# Altium PCB remoter_pcb.PcbDoc
Units mm, origin at the board's own origin, x right, y up, seen from the top; angles counter-clockwise.
Board outline 97.41 x 79.24 mm, 2 copper layers (Top Layer, Bottom Layer); 42 components, 48 nets, 183 pads, 28 vias.
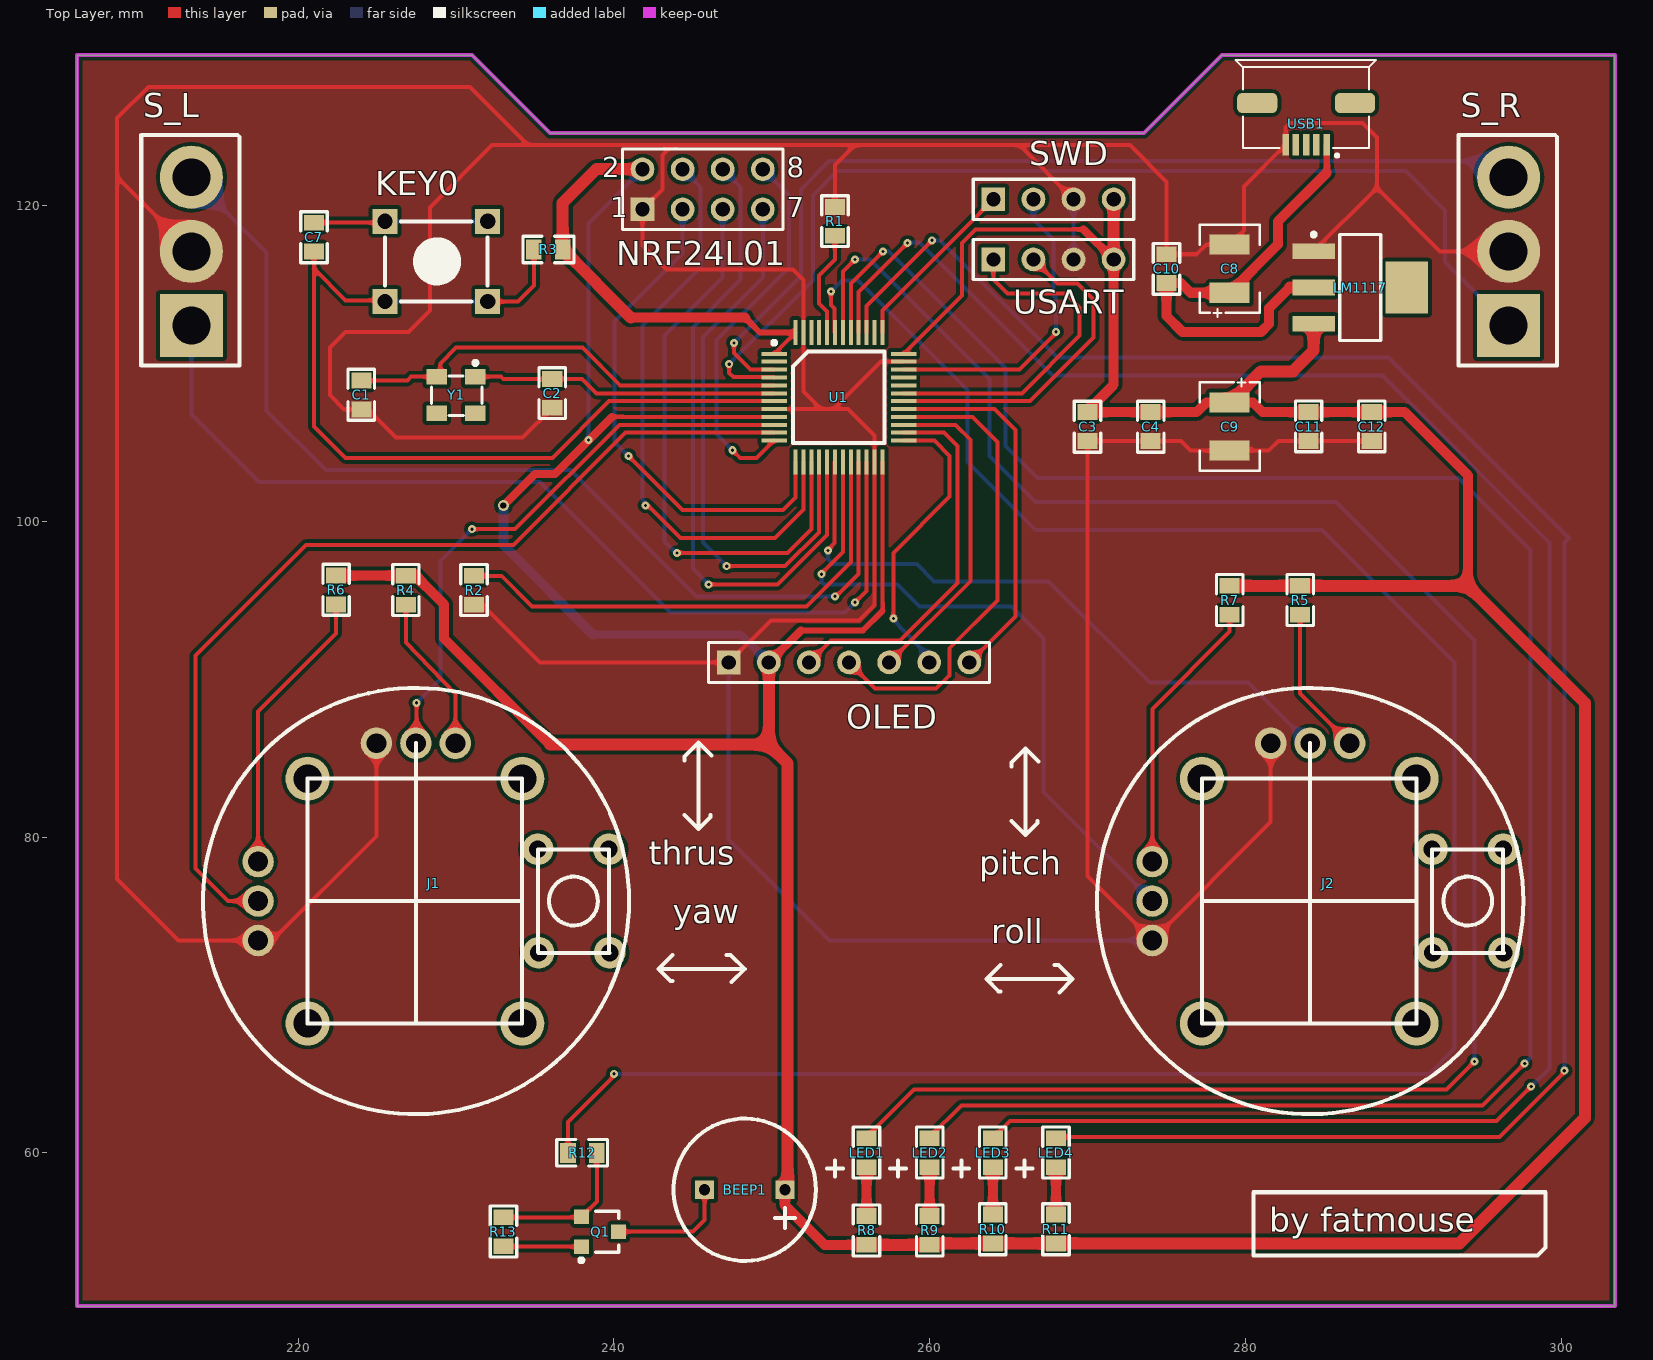
[diagram p0: Top Layer view]
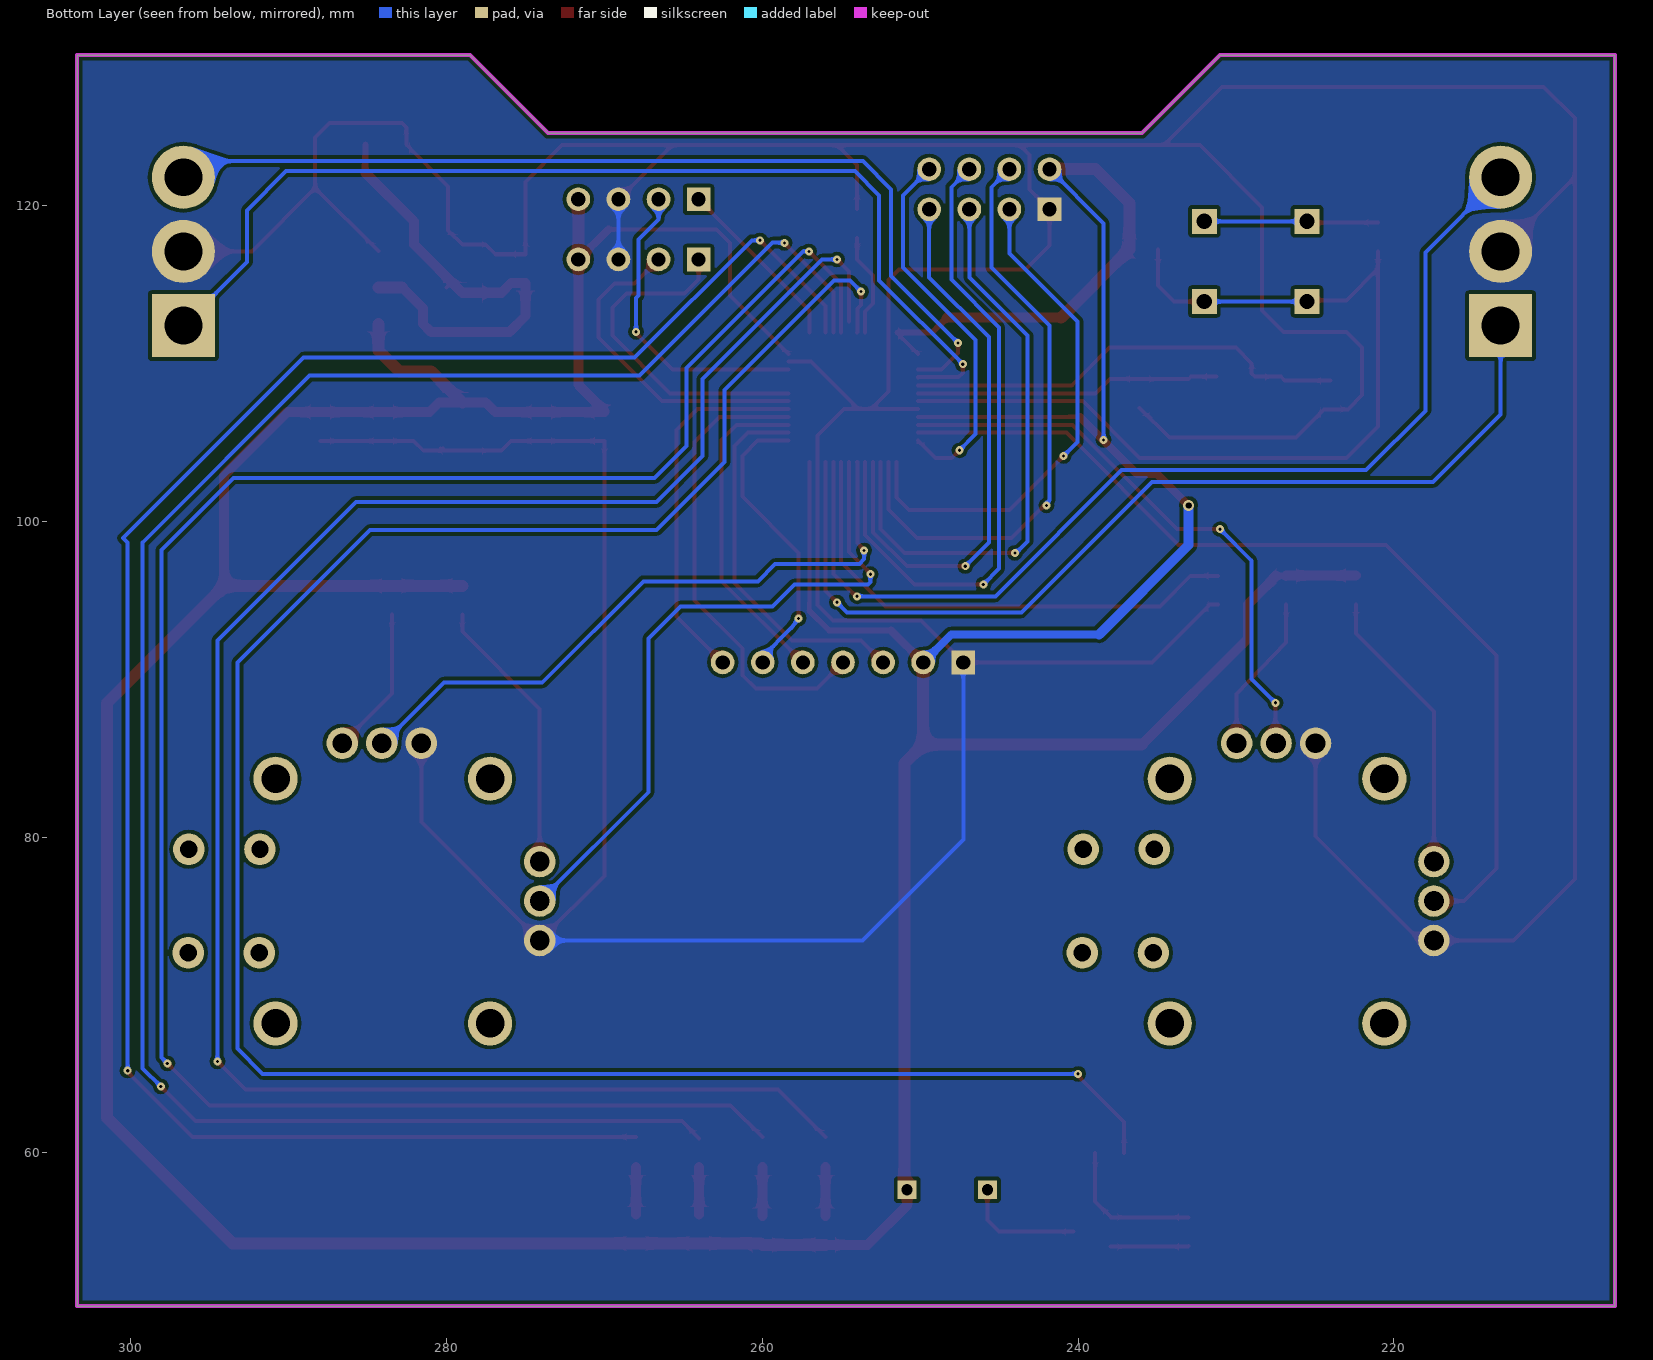
[diagram p1: Bottom Layer view, seen from below]

## Layer stack, top to bottom
Top Solder: solder mask 0.0102, Solder Resist, Dk 3.5
Top Layer: signal copper 0.0356
Dielectric 1: dielectric 0.32, FR-4, Dk 4.8
Bottom Layer: signal copper 0.0356
Bottom Solder: solder mask 0.0102, Solder Resist, Dk 3.5

## Board outline
205.994,50.292 205.994,129.53 231.01,129.53 235.953,124.587 273.567,124.587 278.51,129.53 303.403,129.53 303.403,50.292

## Design rules (kind name [scope] priority, off if disabled: settings)
Clearance [All] p1: gap=0.229 ignorepadtopadclearanceinfootprint=FALSE
ComponentClearance [All] p1 off: gap=0.254 collisioncheckmode=3 verticalgap=0.254 showdistances=FALSE
PolygonConnect [All] p1: connectstyle=Direct reliefconductorwidth=0.254 reliefentries=4 polygonreliefangle="90 Angle" airgapwidth=0.254
RoutingVias [All] p1: holewidth=0.711 width=1.27 viastyle="Through Hole" minholewidth=0.711 minwidth=1.27 maxholewidth=0.711 maxwidth=1.27
SolderMaskExpansion [All] p1: expansion=0.102
Width [All] p1: maxlimit=0.762 minlimit=0.254 preferedwidth=0.254
29 further rules are at their usual default settings.

## Components (designator, comment, footprint, x,y, rotation, side; value= is the part's Value field where it differs from the comment)
BEEP1 "BEEP" BELL-5 250.825,57.658 r180 top
C1 "Cap" 0805 224,108 r90 top value=22pF
C2 "Cap" 0805 236.093,108.102 r90 top value=22pF
C3 "Cap" 0805 270,106 r270 top value=100pF
C4 "Cap" 0805 274,106 r270 top value=100pF
C7 "Cap" 0805 221,118 r270 top value=100pF
C8 "10uF" C1206 279,116 r90 top
C9 "10uF" C1206 279,106 r270 top
C10 "0.01uF" 0805 275,116 r270 top
C11 "0.01uF" 0805 284,106 r90 top
C12 "0.01uF" 0805 288,106 r90 top
J1 "油门摇杆" 摇杆2 231.775,74.295 r180 top
J2 "油门摇杆" 摇杆2 288.417,74.295 r180 top
KEY0 "KEY_L" KEY_M 225.5,119 r0 top
LED1 "BLUE" 0805 256,60 r90 top
LED2 "BLUE" 0805 260,60 r90 top
LED3 "BLUE" 0805 264,60 r90 top
LED4 "BLUE" 0805 268,60 r90 top
LM1117 "LM1117" SOT223_M 287.274,114.808 r0 top
NRF24L01 "NRF24L01" HDR2X4 241.808,119.761 r0 top
OLED "OLED" HDR1X7 247.269,91.059 r0 top
Q1 "S8050" SOT-23R 239,55 r270 top
R1 "Res2" 0805 254,119 r90 top value=1K
R2 "Res2" 0805 231.14,95.631 r90 top value=1K
R3 "Res2" 0805 235.839,117.221 r0 top value=1K
R4 "1K" 0805 226.822,95.631 r90 top
R5 "1K" 0805 283.464,94.996 r90 top
R6 "1K" 0805 222.4,95.65 r90 top
R7 "1K" 0805 279,95 r90 top
R8 "Res2" 0805 256,55.086 r270 top value=1K
R9 "Res2" 0805 260,55.086 r270 top value=1K
R10 "Res2" 0805 264,55.171 r270 top value=1K
R11 "Res2" 0805 268,55.171 r270 top value=1K
R12 "Res2" 0805 238,60 r180 top value=1K
R13 "Res2" 0805 233,55 r90 top value=10K
S_L "SW-SPDT" 扭子开关 213.233,112.395 r90 top
S_R "SW-SPDT" 扭子开关 296.672,112.395 r90 top
SWD "Header 4" HDR1X4 264.033,120.396 r0 top
U1 "STM32F103C8" mTQFP48 250.15,110.609 r0 top
USART "Header 4" HDR1X4 264.033,116.586 r0 top
USB1 "USB" MICROUSB-SOP 283.845,126.492 r0 top
Y1 "8MHZ" "XTAL3225   无源" 230,108 r180 top

## Footprints (in the part's own frame and the unit in brackets; to place one, negate y for a bottom-side part, rotate by r counter-clockwise, add the part's x,y. Pads: shape width x height; smd on the part's side, far side on the other; paste and mask are expansions set on the pad)
0805 [mm]
  rect 1x1.27 smd: 1(-0.914,0) 2(0.914,0)
  silkscreen extent -1.6,-0.84 1.63,0.84
BELL-5 [mm]
  rect 1.2x1.2 hole 0.7: 1(0,0) 2(5.08,0)
  silkscreen extent -1.97,-4.51 7.05,4.51
C1206 [mil] "C1206"
  rect 50x100 smd: 1(-60,0) 2(60,0)
  silkscreen extent -120,-75 110,75
HDR1X4 [mm] "Connector; Header; 4 Position"
  rect 1.5x1.5 hole 0.9: 1(0,0)
  round 1.5 hole 0.9: 2(2.54,0) 3(5.08,0) 4(7.62,0)
  silkscreen extent -1.27,-1.27 8.89,1.27
HDR1X7 [mm] "Connector; Header; 7 Position"
  rect 1.5x1.5 hole 0.9: 1(0,0)
  round 1.5 hole 0.9: 2(2.54,0) 3(5.08,0) 4(7.62,0) 5(10.16,0) 6(12.7,0) 7(15.24,0)
  silkscreen extent -1.27,-1.27 16.51,1.27
HDR2X4 [mm] "Connector; Header; 4x2 Position"
  rect 1.5x1.5 hole 0.9: 1(0,0)
  round 1.5 hole 0.9: 2(0,2.54) 3(2.54,0) 4(2.54,2.54) 5(5.08,0) 6(5.08,2.54) 7(7.62,0) 8(7.62,2.54)
  silkscreen extent -1.27,-1.27 8.89,3.81
KEY_M [mil]
  rect 62x62 hole 38: 1(0,0) 1(255.91,0) 2(0,-200) 2(255.91,-200)
  silkscreen extent 0,-200 255,0
MICROUSB-SOP [mm]
  rrect50% 2.54x1.27 smd: 0(-3.099,0) 0(3.099,0)
  rect 0.4x1.35 smd: 1(1.3,-2.642) 2(0.65,-2.642) 3(0,-2.642) 4(-0.65,-2.642) 5(-1.3,-2.642)
  silkscreen extent -4.47,-3.43 4.42,2.72
mTQFP48 [mm]
  rect 1.6x0.254 smd: 1(0,0) 2(0,-0.5) 3(0,-1) 4(0,-1.5) 5(0,-2) 6(0,-2.5) 7(0,-3) 8(0,-3.5) 9(0,-4) 10(0,-4.5) 11(0,-5) 12(0,-5.5) 25(8.2,-5.5) 26(8.2,-5) 27(8.2,-4.5) 28(8.2,-4) 29(8.2,-3.5) 30(8.2,-3) 31(8.2,-2.5) 32(8.2,-2) 33(8.2,-1.5) 34(8.2,-1) 35(8.2,-0.5) 36(8.2,0)
  rect 0.254x1.6 smd: 13(1.35,-6.85) 14(1.85,-6.85) 15(2.35,-6.85) 16(2.85,-6.85) 17(3.35,-6.85) 18(3.85,-6.85) 19(4.35,-6.85) 20(4.85,-6.85) 21(5.35,-6.85) 22(5.85,-6.85) 23(6.35,-6.85) 24(6.85,-6.85) 37(6.85,1.35) 38(6.35,1.35) 39(5.85,1.35) 40(5.35,1.35) 41(4.85,1.35) 42(4.35,1.35) 43(3.85,1.35) 44(3.35,1.35) 45(2.85,1.35) 46(2.35,1.35) 47(1.85,1.35) 48(1.35,1.35)
  silkscreen extent -0.12,-5.65 7,0.82
SOT223_M [mm] "SOT223, 4-Leads, Body 6.5x3.5mm, Pitch 2.3mm, Lead Span 7mm, IPC Low Density"
  rect 2.7x1 smd: 1(-2.95,2.3) 2(-2.95,0) 3(-2.95,-2.3)
  rect 2.7x3.3 smd: 4(2.95,0)
  silkscreen extent -3.07,-3.35 1.3,3.47, body extent -1.85,-3.35 1.85,3.35, height 1.7
SOT-23R [mm]
  rect 0.9x0.95 smd: 1(0.95,-1.048) 2(-0.95,-1.048) 3(0,1.302)
  silkscreen extent -1.3,-1.19 1.93,1.3
"XTAL3225   无源" [mm]
  rect 1.3x1 smd: 1(-1.219,-1.156) 2(1.219,-1.156) 3(1.219,1.156) 4(-1.219,1.156)
  silkscreen extent -1.65,-2.16 1.55,1.29
扭子开关 [mm]
  rect 4x4 hole 2.4: 1(0,0)
  round 4 hole 2.4: 2(4.7,0) 3(9.4,0)
  silkscreen extent -2.54,-3.05 12.06,3.18
摇杆2 [mm]
  round 2.8 hole 1.8: 0(-2.413,6.102) 0(-2.413,-9.398) 0(11.176,6.102) 0(11.176,-9.398)
  round 2 hole 1.25: 1(14.318,0.849) 2(14.318,-1.651) 3(14.318,-4.151) 4(6.818,-11.651) 5(4.318,-11.651) 6(1.818,-11.651)
  round 2 hole 1.1: J1(-7.95,1.626) J1(-7.904,-4.925) J2(-3.45,1.626) J2(-3.404,-4.925)
  silkscreen extent -9.18,-15.15 17.81,11.85

## Part data
C1 C2 C3 C4 C7: "Capacitor", LatestRevisionDate=17-Jul-2002, LatestRevisionNote="Re-released for DXP Platform.", PackageDescription="Radial Cap, Thru-Hole; 2 Leads; 0.3 in Pin Spacing", PackageReference=RAD-0.3, Published=8-Jun-2000, Publisher="Altium Limited"
C8 C9: library part CAP
C10 C11 C12: library part C
J1 J2: library part 摇杆, "摇杆"
KEY0: library part KEY
LED1 LED2 LED3 LED4: library part LED
LM1117: "线性稳压3.3V"
Q1: library part NPN, "8050/BCW846/BCW847"
R1 R2 R3 R8 R9 R10 R11 R12 R13: "Resistor", LatestRevisionDate=17-Jul-2002, LatestRevisionNote="Re-released for DXP Platform.", PackageDescription="Axial Device, Thru-Hole; 2 Leads; 0.4 in Pin Spacing", PackageReference=AXIAL-0.4, Published=8-Jun-2000, Publisher="Altium Limited"
R4 R5 R6 R7: library part R
S_L S_R: "SPDT Subminiature Toggle Switch, Right Angle Mounting, Vertical Actuation", ComponentLink1Description="Manufacturer Link", ComponentLink1URL=http://www.apem.com, DatasheetVersion=05-Dec-2000, LatestRevisionDate=17-Dec-2003, LatestRevisionNote="Schematic revised, PCB Footprint replaced.", PackageDescription="Switch; 4 Leads", PackageReference=TL36WW15050, Published=24-Mar-1999, Publisher="Altium Limited"
SWD USART: "Header, 4-Pin", LatestRevisionDate=17-Jul-2002, LatestRevisionNote="Re-released for DXP Platform.", Publisher="Altium Limited"
U1: library part STM32F103C6
USB1: library part USB5
Y1: library part XTAL, "Crystal Oscillator", LatestRevisionDate=17-Jul-2002, LatestRevisionNote="Re-released for DXP Platform.", PackageDescription="Crystal, Thru-Hole; 2 Leads; Body 3.1 x 8.2 mm (Dia.xH)", PackageReference=R38, Published=8-Jun-2000, Publisher="Altium Limited"

## Via types
v1: diameter 0.508, hole 0.203, Top Layer to Bottom Layer, 27 vias
v2: diameter 0.711, hole 0.406, Top Layer to Bottom Layer, 1 vias

## Nets (pads, with @x,y where several pads share a name; then routed paths per layer and width w, separated by ;. In a path a pad name is that pad's centre, name@x,y a point inside that pad or via, vN(x,y) a via of type N, cw(c..) or ccw(c..) an arc to the next point about the centre after c; other vN are vias at no path point)
3.3V: BEEP1.1 C3.1 C4.1 C9.1 C11.2 C12.2 LM1117.3 NRF24L01.2 OLED.2 R3.2 R4.2 R5.2 R6.2 R7.2 R8.2 R9.2 R10.2 R11.2 SWD.4 U1.1 U1.9 U1.24 U1.36 U1.48 USART.4 | length 356.1
  Top Layer w0.254: R4.2 R4.2@227.432,96.545 ; 239.882,106.609 U1.9 ; U1.1@250.142,110.617 U1.1 U1.48 ; U1.24 257.023,103.736 257.023,94.336 ; U1.36 262.033,114.292 262.033,117.634 262.89,118.491 269.748,118.491
  Top Layer w0.381: 248.3,112.9 248.76,112.44 249.25,111.95 U1.48@251.45,111.95 ; 251.841,93.091 255.778,93.091 257.023,94.336
  Top Layer w0.508: v2(233,101) 235,103 236.273,103 239.882,106.609 ; OLED.2 251.841,93.091 ; 269.748,118.491 USART.4
  Top Layer w0.635: R6.2 226.803,96.564 R4.2 ; R4.2@227.432,96.545 229.235,94.742 229.235,92.583 235.966,85.852 ; 241.074,112.9 248.3,112.9 ; BEEP1.1@251,57.833 BEEP1.1 250.825,56.675 253.329,54.171 R8.2 ; C3.1 C4.1 276.914,106.914 277.524,107.524 C9.1 280.476,107.524 281.086,106.914 C11.2 C12.2 290.086,106.914 294.09,102.91 294.09,95.91 ; C3.1@270,107 271.653,108.653 USART.4
  Top Layer w0.762: 235.966,85.852 249.809,85.852 ; 241.074,112.9 R3.2 236.753,120.167 238.887,122.301 NRF24L01.2 ; OLED.2 249.809,85.852 ; BEEP1.1@251,57.833 251,84.661 249.809,85.852 ; R8.2 R9.2 260.086,54.257 R10.2 R11.2 293.55,54.257 301.498,62.205 301.498,88.502 294.09,95.91 R5.2 283.46,95.914 R7.2 ; USART.4 SWD.4 ; C9.1 280.976,109.5 283,109.5 284.324,110.824 LM1117.3
  Bottom Layer w0.254: v1(238.379,105.156) 238.379,118.872 NRF24L01.2
  Bottom Layer w0.508: 238.663,92.837 248.031,92.837 OLED.2
  Bottom Layer w0.635: v2(233,101) 233,98.5 238.663,92.837
5V: C8.1 C10.2 LM1117.2 USB1.1 | length 29.9
  Top Layer w0.254: C8.1@279.908,114.91 C8.1@280.01,114.808
  Top Layer w0.381: 285.145,122.077 USB1.1
  Top Layer w0.635: 282.808,114.808 281.5,113.5 281.5,112.5 281,112 276,112 275,113 C10.2 275.914,115.086 276.524,114.476 C8.1 282.067,117.543 282.067,118.999 285.145,122.077
  Top Layer w0.762: 282.808,114.808 LM1117.2
ADC_PITCH: J2.2 U1.19 | length 43.3
  Top Layer w0.254: v1(253.15,96.65) 253.113,96.65 253.1,96.663 254.501,98.064 U1.19 U1.19
  Bottom Layer w0.254: v1(253.15,96.65) 253.15,96.15 253.3,96 257.968,96 259.368,94.6 265.191,94.6 267.208,92.583 267.208,82.837 J2.2
ADC_ROLL: J2.5 U1.18 | length 41.8
  Top Layer w0.254: v1(253.55,98.15) 253.518,98.15 253.983,98.614 253.983,103.742 U1.18
  Bottom Layer w0.254: v1(253.55,98.15) 253.55,97.605 253.855,97.3 259.186,97.3 260.286,96.2 267.528,96.2 273.939,89.789 280.162,89.789 284.005,85.946 J2.5
ADC_THRUS: J1.2 U1.11 | length 60.8
  Top Layer w0.254: J1.2 215.554,75.946 213.5,78 213.5,91.5 220.5,98.5 233.628,98.5 240.738,105.61 U1.11@250.149,105.61
ADC_YAW: J1.5 U1.10 | length 36.9
  Top Layer w0.254: J1.5 227.5,85.989 v1(227.5,88.5) ; v1(231,99.5) 233.738,99.5 240.347,106.109 U1.10
  Bottom Layer w0.254: v1(227.5,88.5) 229,90 229,97.5 v1(231,99.5)
BEEP: R12.2 U1.43 | length 139.8
  Top Layer w0.254: R12.2 237.086,61.953 240,64.867 v1(240,65) ; v1(253.746,114.554) 253.746,113.712 253.983,113.476 253.983,111.976 U1.43
  Bottom Layer w0.254: v1(240,65) 291.65,65 293.243,66.593 293.243,91.059 284.861,99.441 266.7,99.441 262.382,103.759 262.382,108.331 255.463,115.25 254.442,115.25 v1(253.746,114.554)
BOOT0: R1.1 U1.44 | length 6.6
  Top Layer w0.254: U1.44 253.492,111.967 253.492,113.284 252.984,113.792 252.984,115.57 254,116.586 R1.1@254,117.958
BOOT1: R2.2 U1.20 | length 32.2
  Top Layer w0.254: R2.2 232.893,96.545 234.823,94.615 252.195,94.615 255.016,97.436 255.016,103.743 U1.20
GND: C1.1 C2.1 C3.2 C4.2 C8.2 C9.2 C10.1 C11.1 C12.1 J1.1 J1.4 J2.1 J2.4 LM1117.1 NRF24L01.1 OLED.1 R1.2 R2.1 S_L.2 S_R.2 SWD.3 U1.8 U1.23 U1.35 U1.47 USART.3 USB1.5 | length 435.9
  Top Layer w0.254: S_L.2 208.534,121.794 ; J1.4 224.957,80.05 218.353,73.446 J1.1 212.431,73.446 208.534,77.343 208.534,121.794 ; R2.1 231.648,94.717 235.306,91.059 OLED.1 249.936,93.726 255.524,93.726 256.5,94.702 U1.23 256.5,105.419 254.81,107.109 253.921,107.109 ; C2.1 234.205,105.3 226.2,105.3 224.414,107.086 C1.1 222.914,107.086 222,108 222,111 223,112 227,112 228.346,113.346 228.346,119.888 232.283,123.825 234.569,123.825 ; U1.8 253.111,107.109 ; R1.2@254,119.786 R1.2 254,122.555 255.27,123.825 ; U1.35 256.921,110.109 253.921,107.109 ; SWD.3 265.684,123.825 ; C9.2@280.213,104.597 280.289,104.521 280.391,104.623 ; J2.4 281.599,80.946 J2.1 270,77.545 C3.2 C4.2 275.914,105.086 276.524,104.476 C9.2 281.476,104.476 282.086,105.086 C11.1 C12.1 ; LM1117.1 288.32,121.104 ; S_R.2@297.181,116.586 S_R.2 292.329,117.095 288.32,121.104 ; 208.534,121.794 208.534,125.534 210.508,127.508 230.886,127.508 234.569,123.825 ; 234.569,123.825 243.713,123.825 ; 243.713,123.825 255.27,123.825 ; 243.713,123.825 243.078,123.19 243.078,121.031 NRF24L01.1 241.808,117.475 243.332,115.951 251.333,115.951 252,115.284 U1.47 252,108.22 253.111,107.109 ; 253.111,107.109 253.921,107.109 ; 255.27,123.825 265.684,123.825 ; 265.684,123.825 272.675,123.825 275,121.5 C10.1 276.914,116.914 277.524,117.524 C8.2 279.908,118.432 279.908,121.213 USB1.5 282.545,124.938 282.829,125.222 287.401,125.222 288.32,124.303 288.32,121.104
  Bottom Layer w0.254: OLED.1 247.269,79.831 253.654,73.446 J2.1 ; USART.3 SWD.3
LED0: LED1.2 U1.42 | length 123.5
  Top Layer w0.254: U1.42@254.517,112.649 254.5,112.666 254.5,115.816 v1(255.27,116.586) ; LED1.2@256,61 259,64 292.727,64 v1(294.513,65.786)
  Bottom Layer w0.254: v1(255.27,116.586) 256.214,116.586 263.779,109.021 263.779,104.14 266.7,101.219 285.75,101.219 294.513,92.456 v1(294.513,65.786)
LED1: LED2.2 U1.41 | length 130
  Top Layer w0.254: U1.41 255,115.05 v1(257.048,117.098) ; LED2.2@260,61 262,63 295.029,63 v1(297.688,65.659)
  Bottom Layer w0.254: v1(257.048,117.098) 257.419,117.098 264.795,109.722 264.795,104.775 266.827,102.743 293.497,102.743 298.069,98.171 298.069,66.04 v1(297.688,65.659)
LED2: LED3.2 U1.40 | length 125.9
  Top Layer w0.254: U1.40 255.5,114.53 v1(258.6,117.63) ; LED3.2 265.086,62 295.9,62 v1(298.1,64.2)
  Bottom Layer w0.254: v1(258.6,117.63) 258.62,117.65 259.35,117.65 267.78,109.22 288.671,109.22 299.25,98.641 299.25,65.35 v1(298.1,64.2)
LED3: LED4.2 U1.39 | length 123.7
  Top Layer w0.254: U1.39 256,113.65 v1(260.149,117.8) ; LED4.2@268,61 296.106,61 300.306,65.2 v1(300.2,65.2)
  Bottom Layer w0.254: v1(260.149,117.8) 260.66,117.8 268.097,110.363 289.052,110.363 300.482,98.933 300.2,98.651 v1(300.2,65.2)
NetBEEP1_2: BEEP1.2 Q1.3 | length 7.7
  Top Layer w0.254: Q1.3 245,55 245.745,55.745 BEEP1.2
NetC7_1: C7.1 KEY0.1 | length 11
  Top Layer w0.254: C7.1 225.414,118.914 KEY0.1@225.5,119
  Bottom Layer w0.254: KEY0.1@225.5,119 KEY0.1@232,119
NetJ1_3: J1.3 R6.1 | length 18.3
  Top Layer w0.254: J1.3 217.457,87.957 222.4,92.9 R6.1
NetJ1_6: J1.6 R4.1 | length 10
  Top Layer w0.254: R4.1 226.822,92.329 229.957,89.067 J1.6
NetJ2_3: J2.3 R7.1 | length 17.7
  Top Layer w0.254: J2.3 274.099,88.12 279,93.021 R7.1
NetJ2_6: J2.6 R5.1 | length 9.4
  Top Layer w0.254: R5.1 283.464,89.081 J2.6
NetLED1_1: LED1.1 R8.1 | length 3.1
  Top Layer w0.635: R8.1 LED1.1
NetLED2_1: LED2.1 R9.1 | length 3.1
  Top Layer w0.635: R9.1 LED2.1
NetLED3_1: LED3.1 R10.1 | length 3
  Top Layer w0.635: R10.1 LED3.1
NetLED4_1: LED4.1 R11.1 | length 3
  Top Layer w0.635: R11.1 LED4.1
NetQ1_1: Q1.1 R13.1 | length 5
  Top Layer w0.254: R13.1 233.036,54.05 Q1.1
NetQ1_2: Q1.2 R12.1 R13.2 | length 9.4
  Top Layer w0.254: R13.2 237.916,55.914 Q1.2 238.914,56.912 R12.1
NRF_CE: NRF24L01.3 U1.13 | length 32.4
  Top Layer w0.254: v1(240.919,104.14) 244.348,100.711 250.698,100.711 251.5,101.513 U1.13
  Bottom Layer w0.254: v1(240.919,104.14) 240.03,105.029 240.03,112.649 244.348,116.967 NRF24L01.3
NRF_CSN: NRF24L01.4 U1.14 | length 38
  Top Layer w0.254: v1(242,101) 242.154,101 244.221,98.933 250.19,98.933 252,100.743 U1.14
  Bottom Layer w0.254: v1(242,101) 242,101.154 241.808,101.346 241.808,112.395 245.491,116.078 245.491,121.158 NRF24L01.4
NRF_IRQ: NRF24L01.8 U1.12 | length 24.1
  Top Layer w0.254: v1(247.5,104.5) 248,104 249.041,104 U1.12
  Bottom Layer w0.254: v1(247.5,104.5) 246.482,105.518 246.482,111.481 251.079,116.078 251.079,120.65 NRF24L01.8
NRF_MISO: NRF24L01.7 U1.16 | length 36
  Top Layer w0.254: v1(247.142,97.155) 250.837,97.155 252.983,99.3 252.983,103.742 U1.16
  Bottom Layer w0.254: v1(247.142,97.155) 245.65,98.647 245.65,111.665 249.428,115.443 NRF24L01.7
NRF_MOSI: NRF24L01.6 U1.17 | length 41.9
  Top Layer w0.254: v1(246,96) 250.365,96 253.485,99.12 253.485,103.744 U1.17
  Bottom Layer w0.254: v1(246,96) 245,97 245,112.285 248.031,115.316 248.031,121.158 NRF24L01.6
NRF_SCK: NRF24L01.5 U1.15 | length 37
  Top Layer w0.254: v1(244,98) 251,98 252.5,99.5 U1.15
  Bottom Layer w0.254: v1(244,98) 243.929,98 243.205,98.724 243.205,111.76 246.888,115.443 NRF24L01.5
OLED_CS: OLED.7 U1.29 | length 23.6
  Top Layer w0.254: U1.29 264.112,107.109 265.43,105.791 265.43,93.98 OLED.7
OLED_DC: OLED.6 U1.25 | length 18.8
  Top Layer w0.254: v1(257.7,93.85) 257.7,98 261.264,101.564 261.264,104.136 260.291,105.109 U1.25
  Bottom Layer w0.254: v1(257.7,93.85) 258.2,93.2 259.969,91.431 OLED.6
OLED_MOSI: OLED.4 U1.28 | length 30
  Top Layer w0.254: OLED.4 256.54,89.408 260.408,89.408 261.239,90.239 261.239,91.948 264.287,94.996 264.287,105.029 262.707,106.609 U1.28
OLED_RES: OLED.5 U1.27 | length 20.9
  Top Layer w0.254: OLED.5 262.6,96.23 262.6,105.142 261.633,106.109 U1.27
OLED_SCK: OLED.3 U1.26 | length 23.9
  Top Layer w0.254: OLED.3 253.746,92.456 258.118,92.456 261.747,96.085 261.747,104.775 260.913,105.609 U1.26
OSC_IN: C1.2 U1.5 Y1.2 | length 28.4
  Top Layer w0.254: C1.2 226.914,108.914 227.156,109.156 Y1.2 229,109.375 229,110 230,111 238,111 240.399,108.601 250.142,108.601 U1.5
OSC_OUT: C2.2 U1.6 Y1.1 | length 19.4
  Top Layer w0.254: Y1.1 232.844,109.156 233,109 236.076,109 C2.2 237.983,109.017 238.898,108.102 250.143,108.102 U1.6
RST: C7.2 KEY0.2 R3.1 U1.7 | length 60.8
  Top Layer w0.254: C7.2 221,116 ; KEY0.2@225.42,113.42 225.42,114 KEY0.2@225.5,113.92 ; KEY0.2@225.527,114.173 225.354,114 223,114 221,116 ; KEY0.2@232,113.92 233.92,113.92 234.925,114.925 R3.1 ; U1.7 239.689,107.609 236.093,104.013 222.987,104.013 221,106 221,116
  Bottom Layer w0.254: KEY0.2@225.5,113.92 KEY0.2@232,113.92
SW_L_D: S_L.1 U1.22 | length 62.3
  Top Layer w0.254: v1(255.27,94.869) 256,95.599 U1.22
  Bottom Layer w0.254: S_L.1 213.233,106.767 217.511,102.489 235.331,102.489 243.586,94.234 254.635,94.234 v1(255.27,94.869)
SW_L_U: S_L.3 U1.21 | length 66.8
  Top Layer w0.254: v1(254,95.25) 254.079,95.25 255.5,96.671 U1.21
  Bottom Layer w0.254: S_L.3 218,117.028 218,107 221.749,103.251 237.236,103.251 245.237,95.25 v1(254,95.25)
SW_R_D: S_R.1 U1.4 | length 67.1
  Top Layer w0.254: v1(247.3,109.95) 247.3,109.4 247.574,109.126 250.133,109.126 U1.4
  Bottom Layer w0.254: v1(247.3,109.95) 252.603,115.253 252.603,120.65 254.127,122.174 290.176,122.174 292.65,119.7 292.65,116.417 S_R.1
SW_R_U: S_R.3 U1.3 | length 61.1
  Top Layer w0.254: v1(247.6,111.3) 247.6,110.65 248.641,109.609 U1.3
  Bottom Layer w0.254: v1(247.6,111.3) 251.841,115.541 251.841,121.031 253.619,122.809 295.658,122.809 S_R.3
SWCLK: SWD.1 U1.37 | length 11.4
  Top Layer w0.254: U1.37 257,113.363 SWD.1
SWDIO: SWD.2 U1.34 | length 19.7
  Top Layer w0.254: U1.34 265.692,109.609 268,111.917 v1(268,112)
  Bottom Layer w0.254: SWD.2 266.573,119.126 267.843,117.856 267.843,114.3 268,114.143 v1(268,112)
USART_RX: U1.31 USART.1 | length 22.4
  Top Layer w0.254: U1.31 265.843,108.109 269.494,111.76 269.494,113.538 268.605,114.427 264.922,114.427 264.033,115.316 USART.1 USART.1@264.541,116.586
USART_TX: U1.30 USART.2 | length 21.4
  Top Layer w0.254: U1.30 266.359,107.609 270.383,111.633 270.383,114.046 269.367,115.062 268.097,115.062 USART.2 USART.2@266.573,116.205
pads on no net: J1.0 J1.J1 J1.J2 J2.0 J2.J1 J2.J2 LM1117.4 U1.2 U1.32 U1.33 U1.38 U1.45 U1.46 USB1.0 USB1.2 USB1.3 USB1.4 Y1.3 Y1.4

## Polygon pours and split planes (outlines as drawn)
GND on Top Layer "Top Layer-No Net" (solid, remove dead copper, pour order 60): 203,48.5 203,132.5 308.5,132.5 308,132 308,48.5
GND on Bottom Layer "Top Layer-No Net" (solid, remove dead copper, pour order 62): 203.5,133 203.5,46.5 310,46.5 310,132.5 309.5,133

## Keep-outs
Keep-Out Layer:
  the board outline again, w0.254

## Silkscreen, mask and mechanical layers (free items; w line width, h text height)
Top Overlay:
  lines w0.254: 243.713,70.866 243.586,70.866 242.824,71.628 ; 243.713,72.517 242.824,71.628 ; 244.475,81.407 245.364,80.518 ; 244.475,84.836 244.475,85.09 245.364,85.979 ; 245.364,85.852 245.364,85.979 ; 246.126,81.407 246.126,81.28 245.364,80.518 ; 246.189,85.153 245.364,85.979 ; 247.142,72.517 247.396,72.517 248.285,71.628 ; 247.459,70.802 248.285,71.628 ; 248.158,71.628 248.285,71.628 ; 253.5,59 254.5,59 ; 254,58.5 254,59.5 ; 257.5,59 258.5,59 ; 258,58.5 258,59.5 ; 261.5,59 262.5,59 ; 262,58.5 262,59.5 ; 264.477,70.231 264.351,70.231 263.589,70.993 ; 264.477,71.882 263.589,70.993 ; 265.176,81.026 266.065,80.137 ; 265.176,84.455 265.176,84.709 266.065,85.598 ; 265.5,59 266.5,59 ; 266,58.5 266,59.5 ; 266.065,85.471 266.065,85.598 ; 266.827,81.026 266.827,80.899 266.065,80.137 ; 266.89,84.772 266.065,85.598 ; 267.906,71.882 268.161,71.882 269.049,70.993 ; 268.224,70.168 269.049,70.993 ; 268.923,70.993 269.049,70.993 ; 242.824,71.628 248.285,71.628 ; 245.364,80.518 245.364,85.979 ; 263.589,70.993 269.049,70.993 ; 266.065,80.137 266.065,85.598 ; 280.5,53.5 298.5,53.5 299,54 299,57.5 280.5,57.5 280.5,53.5
  text "thrus" at 242.189,78.232 h1.52
  text "pitch" at 263.144,77.597 h1.52
  text "yaw" at 243.713,74.549 h1.52
  text "roll" at 263.906,73.279 h1.52
  text "by fatmouse" at 281.5,55 h1.52

## Text inside footprints (layer, text, board x,y; h text height)
NRF24L01: Top Overlay "2" at 239.268,121.793 h1.27; Top Overlay "1" at 239.776,119.253 h1.27; Top Overlay "7" at 250.952,119.253 h1.27; Top Overlay "8" at 250.952,121.793 h1.27